# EAGLE board EHDD_LAB_1 (EAGLE 7.7.0)
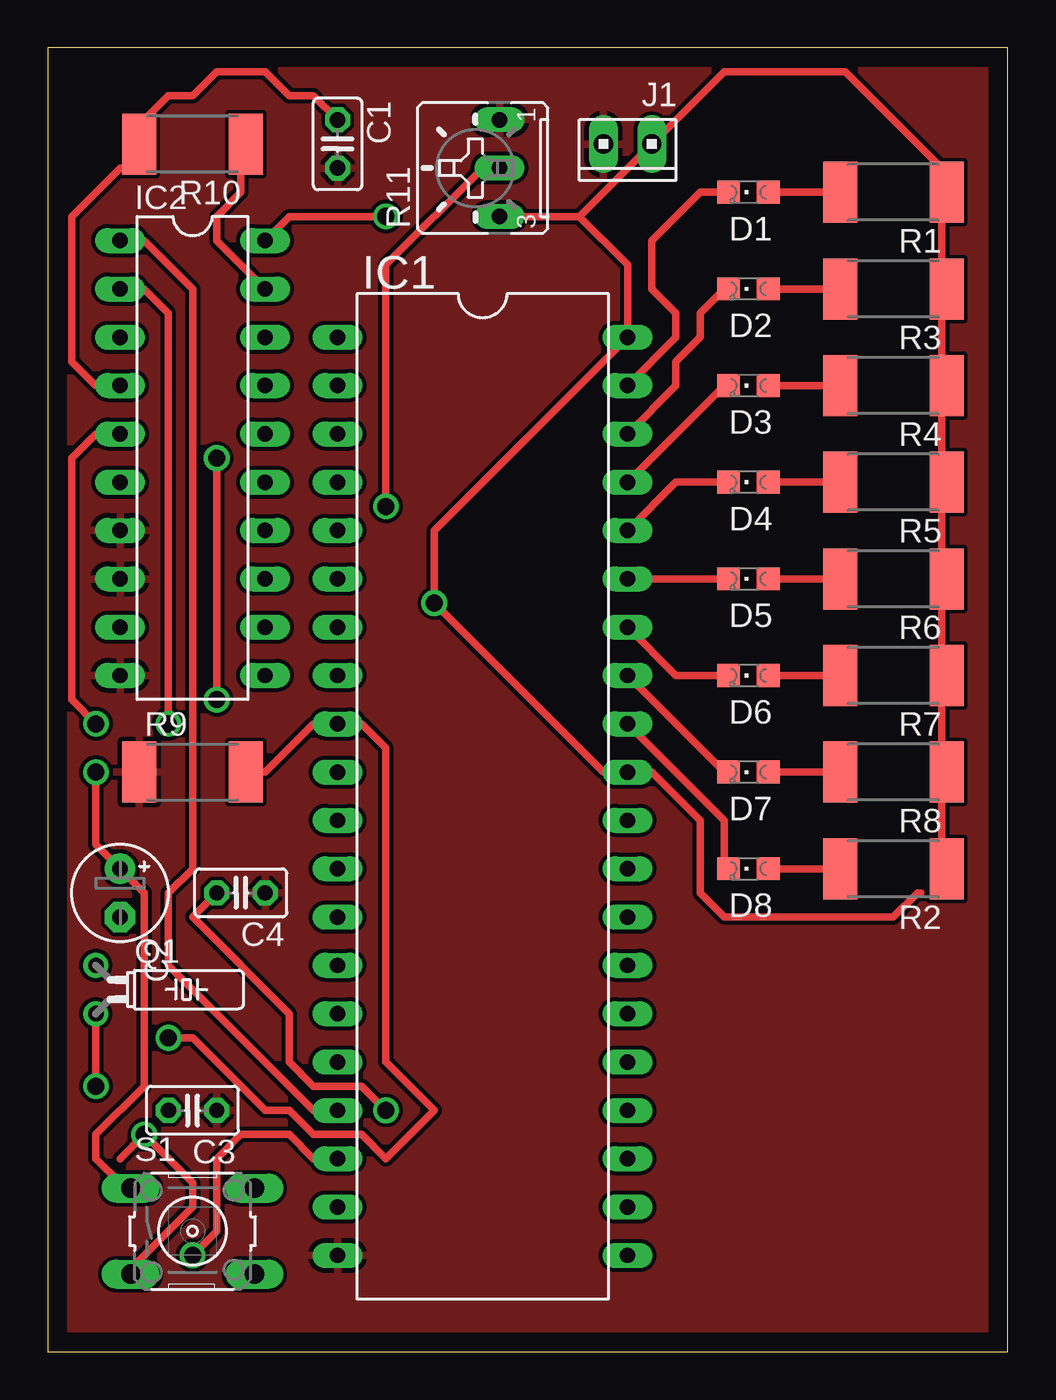
[diagram p0: board, top side]
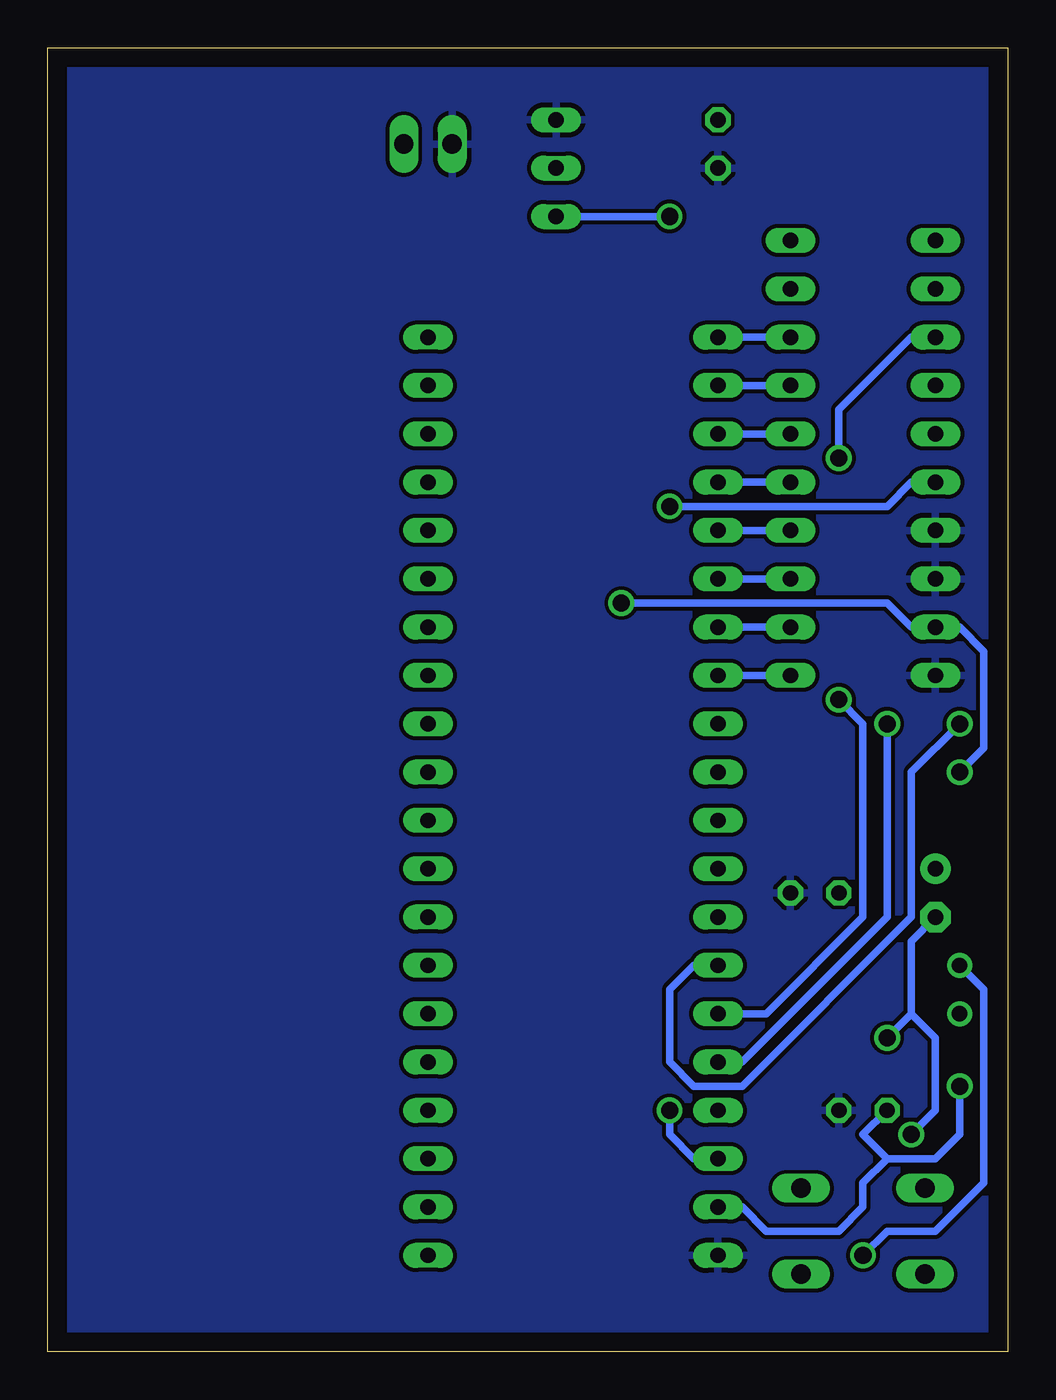
[diagram p1: board, bottom side, seen from below]

Size 50.47 x 68.57 mm. Coordinates in mm from the lower left corner, seen from the top.
Outline: 0,0 50.47,0 50.47,68.57 0,68.57 0,0
Copper layers (1*16): Top 0.035mm / dielectric 1.5mm / Bottom 0.035mm
Design rules "default": minimum track width 10mil, minimum drill 24mil, track to track 8mil, track to pad 8mil, pad to pad 8mil, via to via 8mil, smd to smd 8mil, copper to edge 40mil, drill to drill 8mil, minimum pad ring 10mil, minimum via ring 8mil, stop-mask expansion 4mil, vias tented up to drill 0mil, thermal gap 10mil

## Footprints (pad centres in the part's own frame; a part is rotated, then mirrored left to right if it is on the bottom)
C025-025X050 = drill 0.813 octagon: 1 -1.27,0; 2 1.27,0
E2,5-5 = drill 0.813 pad 1.6: + -1.27,0 | drill 0.813 pad 1.6 octagon: - 1.27,0
CHIPLED_0805 = smd 1.2 x 1.2: A 0,-1.05; C 0,1.05
DIL40 = drill 0.813 long: 1 -24.13,-7.62; 2 -21.59,-7.62; 3 -19.05,-7.62; 4 -16.51,-7.62; 5 -13.97,-7.62; 6 -11.43,-7.62; 7 -8.89,-7.62; 8 -6.35,-7.62; 9 -3.81,-7.62; 10 -1.27,-7.62; 11 1.27,-7.62; 12 3.81,-7.62; 13 6.35,-7.62; 14 8.89,-7.62; 15 11.43,-7.62; 16 13.97,-7.62; 17 16.51,-7.62; 18 19.05,-7.62; 19 21.59,-7.62; 20 24.13,-7.62; 21 24.13,7.62; 22 21.59,7.62; 23 19.05,7.62; 24 16.51,7.62; 25 13.97,7.62; 26 11.43,7.62; 27 8.89,7.62; 28 6.35,7.62; 29 3.81,7.62; 30 1.27,7.62; 31 -1.27,7.62; 32 -3.81,7.62; 33 -6.35,7.62; 34 -8.89,7.62; 35 -11.43,7.62; 36 -13.97,7.62; 37 -16.51,7.62; 38 -19.05,7.62; 39 -21.59,7.62; 40 -24.13,7.62
DIL20 = drill 0.813 long: 1 -11.43,-3.81; 2 -8.89,-3.81; 3 -6.35,-3.81; 4 -3.81,-3.81; 5 -1.27,-3.81; 6 1.27,-3.81; 7 3.81,-3.81; 8 6.35,-3.81; 9 8.89,-3.81; 10 11.43,-3.81; 11 11.43,3.81; 12 8.89,3.81; 13 6.35,3.81; 14 3.81,3.81; 15 1.27,3.81; 16 -1.27,3.81; 17 -3.81,3.81; 18 -6.35,3.81; 19 -8.89,3.81; 20 -11.43,3.81
10X02MTA = drill 1.016 long: 1 1.27,0; 2 -1.27,0
TC26H = drill 0.813: 1 -1.27,0; 2 1.27,0
R2512 = smd 1.8 x 3.2: 1 -2.8,0; 2 2.8,0
B25U = drill 0.813 long: A 2.54,-0.889; E -2.54,-0.889; S 0,-0.889
B3F-10XX = drill 1.016 long: 1 -3.251,2.261; 2 3.251,2.261; 3 -3.251,-2.261; 4 3.251,-2.261

## Placement (x,y rotation side)
C1  150uF  [C025-025X050]  15.24,63.5 270 top
C2  10uF/10V  [E2,5-5]  3.81,24.13 270 top
C3  33pF  [C025-025X050]  7.62,12.7 180 top
C4  33pF  [C025-025X050]  10.16,24.13 180 top
D1  [CHIPLED_0805]  36.83,60.96 90 top
D2  [CHIPLED_0805]  36.83,55.88 90 top
D3  [CHIPLED_0805]  36.83,50.8 90 top
D4  [CHIPLED_0805]  36.83,45.72 90 top
D5  [CHIPLED_0805]  36.83,40.64 90 top
D6  [CHIPLED_0805]  36.83,35.56 90 top
D7  [CHIPLED_0805]  36.83,30.48 90 top
D8  [CHIPLED_0805]  36.83,25.4 90 top
IC1  AT89C51-12PC  [DIL40]  22.86,29.21 270 top
IC2  ADC0801  [DIL20]  7.62,46.99 270 top
J1  [10X02MTA]  30.48,63.5 180 top
Q1  11.0592MHz  [TC26H]  2.54,19.05 270 top
R1  [R2512]  44.45,60.96 180 top
R2  [R2512]  44.45,25.4 180 top
R3  [R2512]  44.45,55.88 180 top
R4  [R2512]  44.45,50.8 180 top
R5  [R2512]  44.45,45.72 180 top
R6  [R2512]  44.45,40.64 180 top
R7  [R2512]  44.45,35.56 180 top
R8  [R2512]  44.45,30.48 180 top
R9  8.2K  [R2512]  7.62,30.48 0 top
R10  10K  [R2512]  7.62,63.5 180 top
R11  10K  [B25U]  22.86,62.23 90 top
S1  Reset  [B3F-10XX]  7.62,6.35 0 top

## Library data of the parts
C1-C4 R1-R10 = rcl
D1-D8 = led
IC1 = atmel; OC_FARNELL: unknown; OC_NEWARK: unknown
IC2 = linear
J1 = con-amp
Q1 = crystal; OC_FARNELL: unknown; OC_NEWARK: unknown
R11 = pot
S1 = switch-omron; MPN: B3F-1000; OC_FARNELL: 176432; OC_NEWARK: 36M3542

## Nets
CS: IC1.17 IC2.1
GND: C1.2 C3.1 C4.1 IC1.20 IC2.7 IC2.8 IC2.10 J1.1 R9.1 R11.A
INTR: IC1.14 IC2.5
N$1: IC1.1 IC2.18
N$2: IC1.2 IC2.17
N$3: IC1.3 IC2.16
N$4: IC1.4 IC2.15
N$5: IC1.5 IC2.14
N$6: IC1.6 IC2.13
N$7: IC1.7 IC2.12
N$8: IC1.8 IC2.11
N$9: C2.- IC1.9 R9.2 S1.3
N$10: C3.2 IC1.19 Q1.2
N$11: D1.C IC1.39
N$12: D2.C IC1.38
N$13: D3.C IC1.37
N$14: C4.2 IC1.18 Q1.1
N$15: D4.C IC1.36
N$16: D5.C IC1.35
N$17: D6.C IC1.34
N$18: D7.C IC1.33
N$19: D8.C IC1.32
N$20: D1.A R1.2
N$21: D2.A R3.2
N$22: D3.A R4.2
N$23: D4.A R5.2
N$24: D5.A R6.2
N$25: D6.A R7.2
N$26: D7.A R8.2
N$27: D8.A R2.2
N$30: IC2.6 R11.S
N$33: IC2.19 R10.1
N$35: C1.1 IC2.4 R10.2
RD: IC1.16 IC2.2
VCC: C2.+ IC1.31 IC1.40 IC2.9 IC2.20 J1.2 R1.1 R2.1 R3.1 R4.1 R5.1 R6.1 R7.1 R8.1 R11.E S1.1
WR: IC1.15 IC2.3

## Tracks (layer width: path | path; a pad name or v marks a point on that pad's centre or on a via)
CS
  Top 0.406: IC2.1 5.08,58.42 7.62,55.88 7.62,25.4 6.35,24.13 6.35,20.32 13.97,12.7 IC1.17
GND
  pour Bottom: 0,68.58 50.8,68.58 50.8,0 0,0
  pour Top: 0,68.58 0,0 50.8,0 50.8,68.58
INTR  (via drill 0.9)
  Top 0.406: IC2.5 2.54,48.26 1.27,46.99 1.27,34.29 v2.54,33.02
  Bottom 0.406: v2.54,33.02 5.08,30.48 5.08,22.86 13.97,13.97 16.51,13.97 17.78,15.24 17.78,19.05 16.51,20.32 IC1.14
N$1
  Bottom 0.406: IC1.1 IC2.18
N$2
  Bottom 0.406: IC1.2 IC2.17
N$3
  Bottom 0.406: IC1.3 IC2.16
N$4
  Bottom 0.406: IC1.4 IC2.15
N$5
  Bottom 0.406: IC1.5 IC2.14
N$6
  Bottom 0.406: IC2.13 IC1.6
N$7
  Bottom 0.406: IC2.12 IC1.7
N$8
  Bottom 0.406: IC2.11 IC1.8
N$9  (via drill 0.9)
  Top 0.406: 10.16,30.48 R9.2 11.43,30.48 13.97,33.02 IC1.9 16.51,33.02 17.78,31.75 17.78,15.24 20.32,12.7 17.78,10.16 16.51,11.43 13.97,11.43 12.7,12.7 11.43,12.7 7.62,16.51 v6.35,16.51 | 3.81,10.16 v5.08,11.43 7.62,8.89 7.62,7.62 3.81,3.81 S1.3
  Bottom 0.406: v5.08,11.43 3.81,12.7 3.81,16.51 5.08,17.78 | 5.08,17.78 5.08,21.59 C2.- | 5.08,17.78 v6.35,16.51
N$10  (via drill 0.9)
  Top 0.406: v2.54,13.97 Q1.2
  Bottom 0.406: v2.54,13.97 2.54,11.43 3.81,10.16 6.35,10.16 | 6.35,10.16 7.62,11.43 C3.2 | IC1.19 13.97,7.62 12.7,6.35 8.89,6.35 7.62,7.62 7.62,8.89 6.35,10.16
N$11
  Top 0.406: IC1.39 33.02,53.34 33.02,54.61 31.75,55.88 31.75,58.42 34.29,60.96 D1.C
N$12
  Top 0.406: IC1.38 33.02,50.8 33.02,52.07 34.29,53.34 34.29,54.61 35.56,55.88 D2.C
N$13
  Top 0.406: IC1.37 35.56,50.8 D3.C
N$14  (via drill 0.9)
  Top 0.406: v17.78,12.7 16.51,13.97 13.97,13.97 12.7,15.24 12.7,17.78 7.62,22.86 C4.2 | v7.62,5.08 8.89,6.35 8.89,10.16 10.16,11.43 12.7,11.43 13.97,10.16 IC1.18
  Bottom 0.406: IC1.18 16.51,10.16 17.78,11.43 v17.78,12.7 | Q1.1 1.27,19.05 1.27,8.89 3.81,6.35 6.35,6.35 v7.62,5.08
N$15
  Top 0.406: IC1.36 33.02,45.72 D4.C
N$16
  Top 0.406: D5.C IC1.35
N$17
  Top 0.406: IC1.34 33.02,35.56 D6.C
N$18
  Top 0.406: IC1.33 35.56,30.48 D7.C
N$19
  Top 0.406: IC1.32 35.56,27.94 35.56,25.4 D8.C
N$20
  Top 0.406: D1.A R1.2 41.91,60.96
N$21
  Top 0.406: D2.A R3.2 41.91,55.88
N$22
  Top 0.406: D3.A R4.2 41.91,50.8
N$23
  Top 0.406: D4.A R5.2 41.91,45.72
N$24
  Top 0.406: D5.A R6.2 41.91,40.64
N$25
  Top 0.406: D6.A R7.2 41.91,35.56
N$26
  Top 0.406: D7.A R8.2 41.91,30.48
N$27
  Top 0.406: D8.A R2.2 41.91,25.4
N$30  (via drill 0.9)
  Top 0.406: v17.78,44.45 17.78,57.15 22.86,62.23 R11.S
  Bottom 0.406: v17.78,44.45 6.35,44.45 5.08,45.72 IC2.6
N$33
  Top 0.406: IC2.19 8.89,58.42 8.89,59.69 10.16,60.96 10.16,63.5 R10.1
N$35
  Top 0.406: 5.08,63.5 5.08,64.77 6.35,66.04 7.62,66.04 8.89,67.31 11.43,67.31 12.7,66.04 13.97,66.04 C1.1 | IC2.4 2.54,50.8 1.27,52.07 1.27,59.69 3.81,62.23 5.08,62.23 5.08,63.5 | 5.08,63.5 R10.2
RD  (via drill 0.9)
  Top 0.406: IC2.2 5.08,55.88 6.35,54.61 v6.35,33.02
  Bottom 0.406: v6.35,33.02 6.35,22.86 13.97,15.24 IC1.16
VCC  (via drill 0.9)
  Top 0.406: v2.54,30.48 2.54,26.67 C2.+ 5.08,24.13 5.08,13.97 2.54,11.43 2.54,10.16 3.81,8.89 S1.1 | v17.78,59.69 12.7,59.69 IC2.20 | R11.E 27.94,59.69 | 27.94,59.69 J1.2 35.56,67.31 41.91,67.31 46.99,62.23 46.99,60.96 | 27.94,59.69 30.48,57.15 IC1.40 20.32,43.18 v20.32,39.37 29.21,30.48 IC1.31 31.75,30.48 34.29,27.94 34.29,24.13 35.56,22.86 44.45,22.86 45.72,24.13 45.89,24.13 | 46.99,60.96 46.99,55.88 | 46.99,60.96 R1.1 | 46.99,55.88 46.99,50.8 | 46.99,55.88 R3.1 | 46.99,50.8 46.99,45.72 | 46.99,50.8 R4.1 | 46.99,45.72 46.99,40.64 | 46.99,45.72 R5.1 | 46.99,40.64 46.99,35.56 | 46.99,40.64 R6.1 | 46.99,30.48 46.99,35.56 | 46.99,35.56 R7.1 | 46.99,30.48 46.99,25.4 R2.1 | 46.99,30.48 R8.1
  Bottom 0.406: v2.54,30.48 1.27,31.75 1.27,36.83 2.54,38.1 IC2.9 5.08,38.1 6.35,39.37 v20.32,39.37 | v17.78,59.69 R11.E
WR  (via drill 0.9)
  Top 0.406: v8.89,34.29 v8.89,46.99
  Bottom 0.406: v8.89,46.99 8.89,49.53 5.08,53.34 IC2.3 | v8.89,34.29 7.62,33.02 7.62,22.86 12.7,17.78 IC1.15